# EAGLE board Pcb (EAGLE 9.6.2)
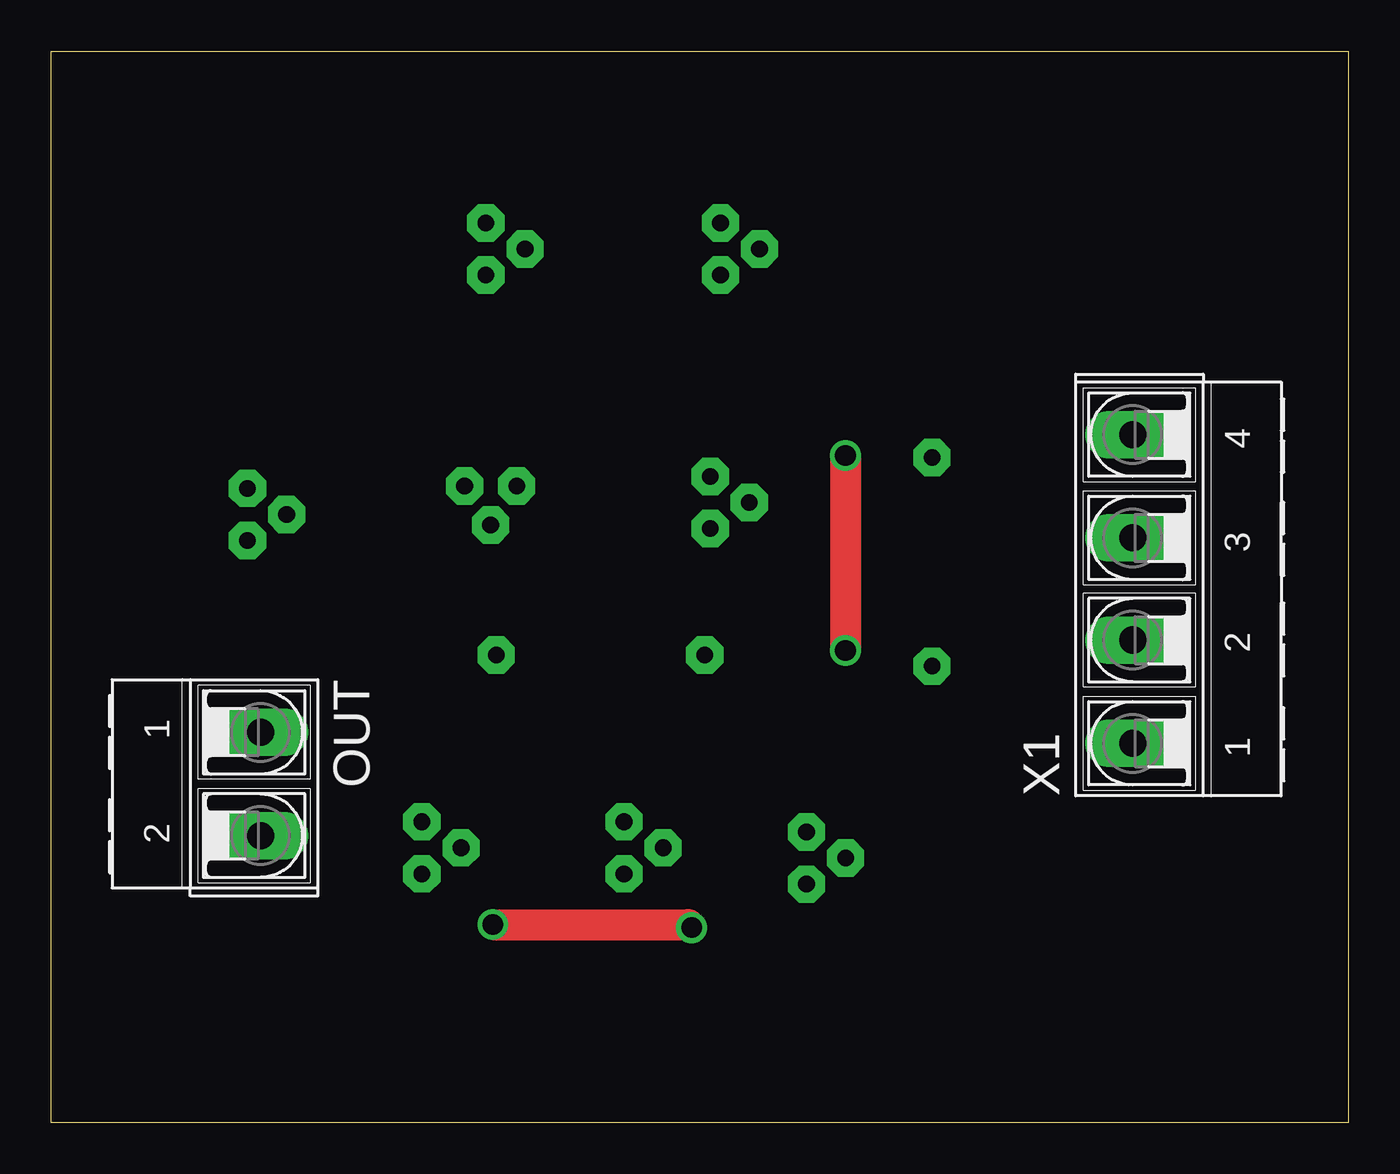
[diagram p0: board, top side]
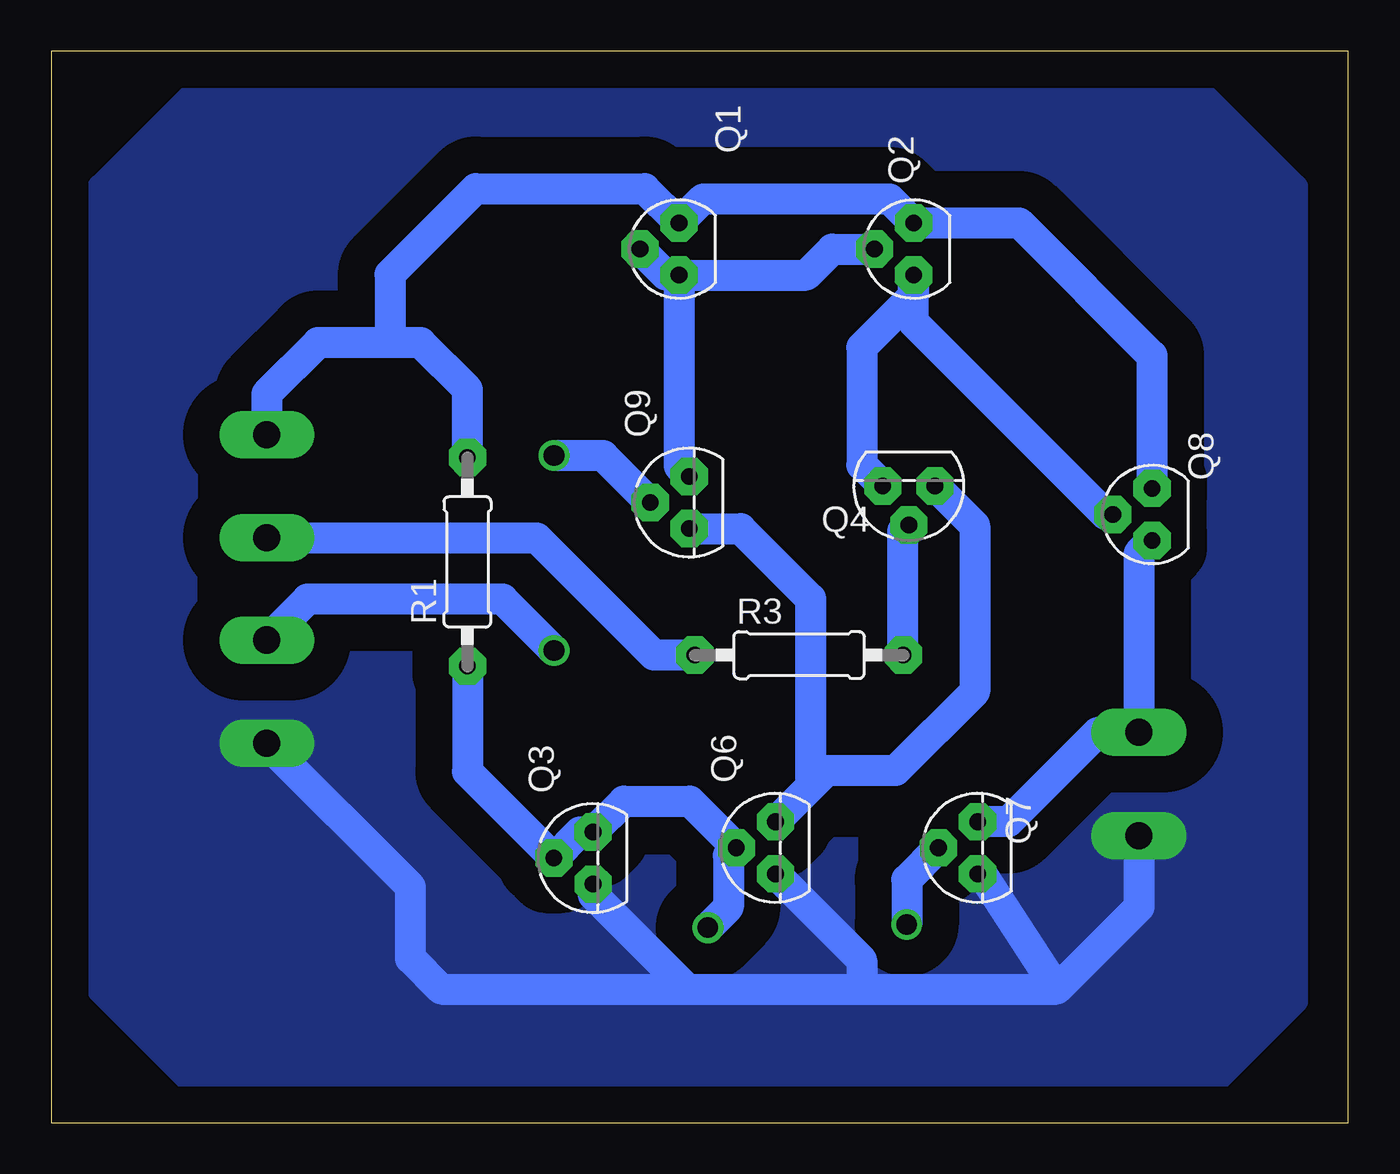
[diagram p1: board, bottom side, seen from below]

Size 63.2 x 52.19 mm. Coordinates in mm from the lower left corner, seen from the top.
Outline: 63.2,0 0,0 0,52.19 63.2,52.19 63.2,0
Copper layers (1*16): Top 0.035mm / dielectric 1.5mm / Bottom 0.035mm
Design rules "default *": minimum track width 6mil, minimum drill 0.35mm, track to track 6mil, track to pad 6mil, pad to pad 6mil, via to via 6mil, smd to smd 6mil, copper to edge 40mil, drill to drill 6mil, minimum pad ring 0.5mm, minimum via ring 8mil, stop-mask expansion 4mil, vias tented up to drill 0mil, thermal gap 10mil
Net classes: 0 default: width 1.5 mm

## Footprints (pad centres in the part's own frame; a part is rotated, then mirrored left to right if it is on the bottom)
AK500/2-H = drill 1.321 long: 1 -2.515,0; 2 2.515,0
SOT54E = drill 0.813 octagon: D -1.27,0; G 0,1.905; S 1.27,0
TO92F = drill 0.813 octagon: D 1.27,0; G 0,1.905; S -1.27,0
0207/10 = drill 0.813 octagon: 1 -5.08,0; 2 5.08,0
AK500/4-H = drill 1.321 long: 1 -7.518,0; 2 -2.489,0; 3 2.489,0; 4 7.518,0

## Placement (x,y rotation side)
OUT  [AK500/2-H]  10.2,16.5 270 top
Q1  BS250  [SOT54E]  32.61,42.56 90 bottom
Q2  BS250  [SOT54E]  21.18,42.56 90 bottom
Q3  2N3819  [TO92F]  36.8,12.89 90 bottom
Q4  2N3819  [TO92F]  21.41,31.02 180 bottom
Q6  2N3819  [TO92F]  27.91,13.39 90 bottom
Q7  2N3819  [TO92F]  18.06,13.39 90 bottom
Q8  BS250  [SOT54E]  9.56,29.63 90 bottom
Q9  2N3819  [TO92F]  32.11,30.21 90 bottom
R1  5k  [0207/10]  42.92,27.32 90 bottom
R3  50k  [0207/10]  26.76,22.78 0 bottom
X1  [AK500/4-H]  52.7,26 90 top

## Library data of the parts
OUT X1 = con-ptr500; OC_FARNELL: unknown; OC_NEWARK: unknown
Q1-Q4 Q6-Q9 = transistor-small-signal
R1 = rcl; SPICEPREFIX: R
R3 = rcl; SPICEPREFIX: 50000

## Nets
GND: OUT.2 Q3.S Q6.S Q7.S X1.1
N$1: Q3.D Q3.G Q6.G Q7.G R1.1
N$2: Q9.G X1.2
N$3: Q4.S Q6.D Q9.S
N$4: Q1.D Q1.G Q2.G Q9.D
N$6: Q2.D Q4.D Q8.G
N$9: Q4.G R3.2
N$10: R3.1 X1.3
OUT: OUT.1 Q7.D Q8.D
VCC: Q1.S Q2.S Q8.S R1.2 X1.4

## Tracks (layer width: path | path; a pad name or v marks a point on that pad's centre or on a via)
GND
  Bottom 1.5: 14.2,6.5 17.77,11.99 Q7.S | 23.7,6.5 14.2,6.5 | Q3.S 36.8,11.1 32.2,6.5 | 32.2,6.5 23.7,6.5 | 32.2,6.5 44.2,6.5 45.7,8 45.7,11.48 X1.1 | OUT.2 10.2,10.5 14.2,6.5 | Q6.S 23.7,7.91 23.7,6.5
  pour Bottom (isolate 1.778, no thermals): 2.7,45.5 7.2,50 56.2,50 60.7,45.5 60.7,6.5 56.2,2 6.7,2 2.7,6
N$1  (via drill 1)
  Top 1.5: v31.2,9.5 31.05,9.65 v21.52,9.65
  Bottom 1.5: R1.1 42.92,17.11 Q3.G 37.44,14.16 Q3.D 35.3,15.66 32.09,15.66 Q6.G 30.2,13.01 30.2,10.5 v31.2,9.5 | Q7.G 21.52,11.84 v21.52,9.65
N$2  (via drill 1)
  Top 1.5: v38.7,32.5 v38.7,23
  Bottom 1.5: Q9.G 36.3,32.5 v38.7,32.5 | v38.7,23 41.2,25.5 50.71,25.5 X1.2
N$3
  Bottom 1.5: Q9.S 29.61,28.94 26.2,25.53 26.2,16.37 Q6.D 25.41,17.16 22.04,17.16 18.2,21 18.2,29.08 Q4.S
N$4
  Bottom 1.5: Q1.D 32.61,31.98 Q9.D | Q1.D 33.25,41.29 Q1.G | Q1.D 26.41,41.29 25.14,42.56 Q2.G
N$6
  Bottom 1.5: Q8.G 11.83,29.63 21.18,38.98 Q2.D 21.18,40.29 23.7,37.77 23.7,32.04 Q4.D
N$9
  Bottom 1.5: R3.2 21.7,22.8 21.7,28.82 Q4.G
N$10
  Bottom 1.5: X1.3 39.55,28.49 33.84,22.78 R3.1
OUT
  Bottom 1.5: Q8.D 10.2,27.72 OUT.1 12.2,19.02 16.55,14.66 Q7.D
VCC
  Bottom 1.5: Q8.S 9.56,37.36 16.03,43.83 Q2.S 22.35,45 31.44,45 Q1.S 34.28,45.5 42.52,45.5 46.7,41.32 46.7,38 | R1.2 42.92,35.72 45.2,38 46.7,38 | 46.7,38 50.2,38 52.7,35.5 X1.4